# Altium PCB PCB2.PcbDoc
Units mil, origin at the board's own origin, x right, y up, seen from the top; angles counter-clockwise.
Board outline 3800 x 2500 mil, 2 copper layers (Top Layer, Bottom Layer); 24 components, 0 nets, 70 pads, 4 vias.
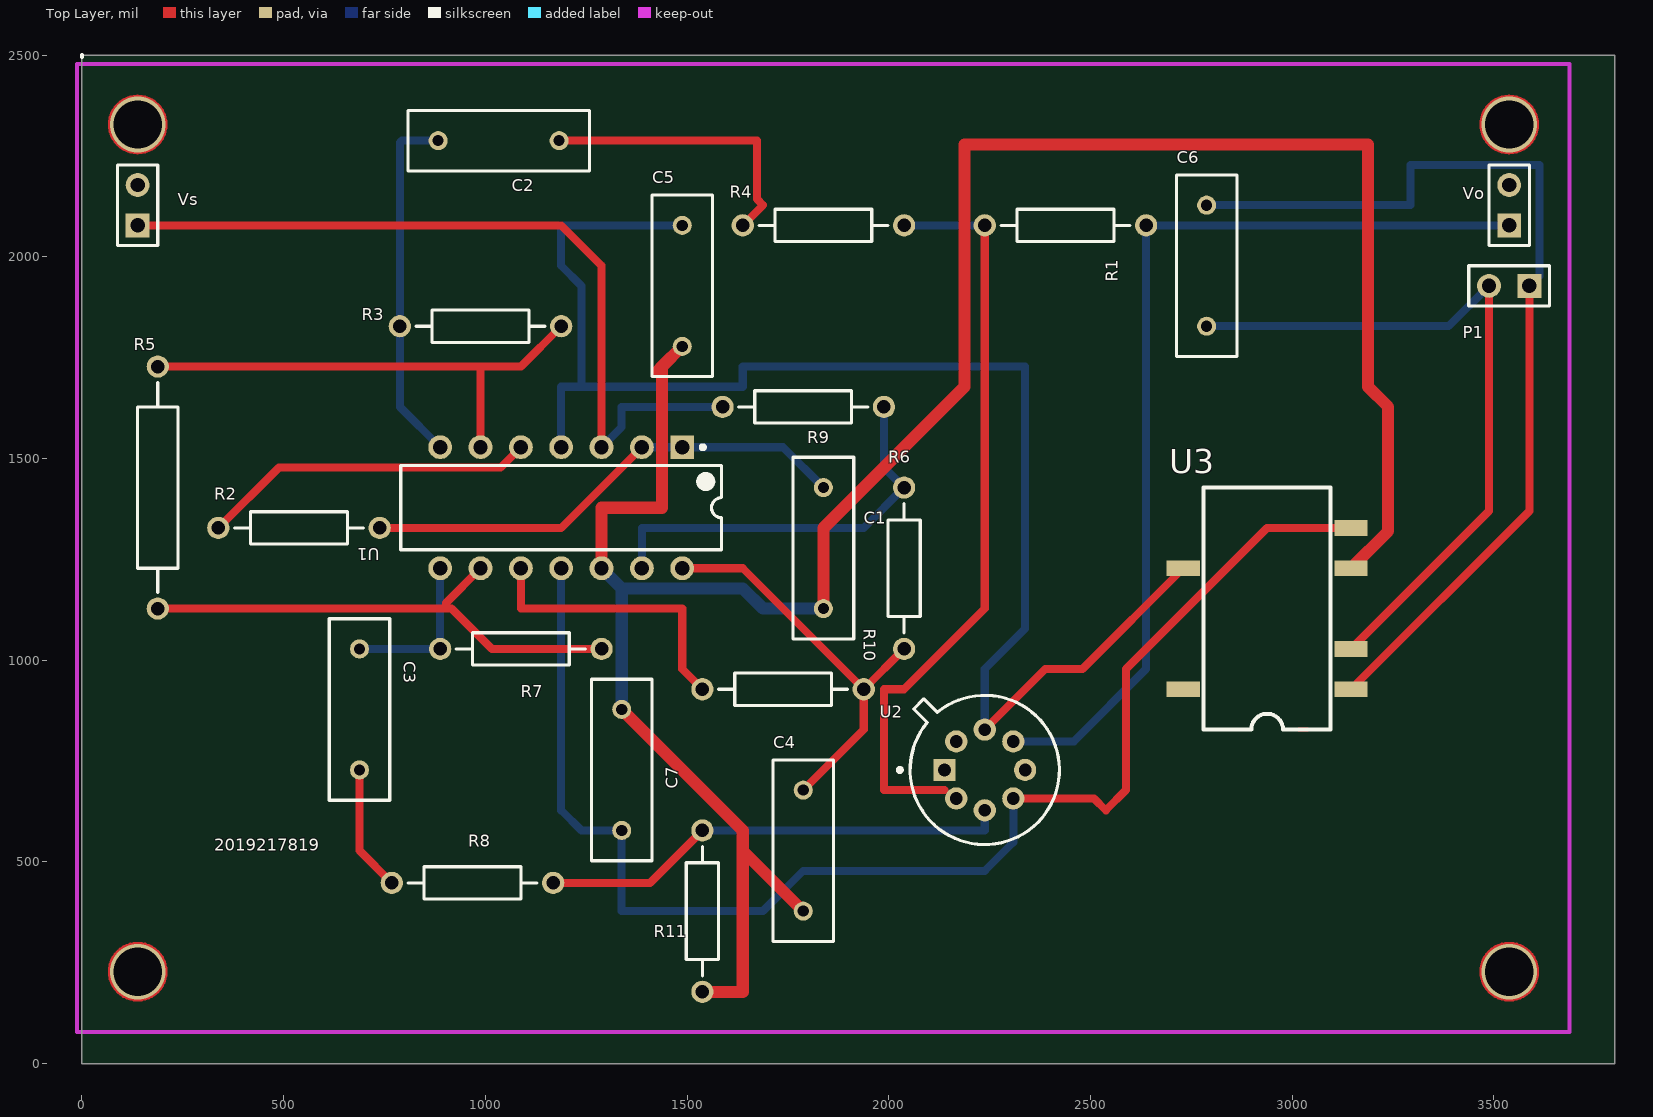
[diagram p0: Top Layer view]
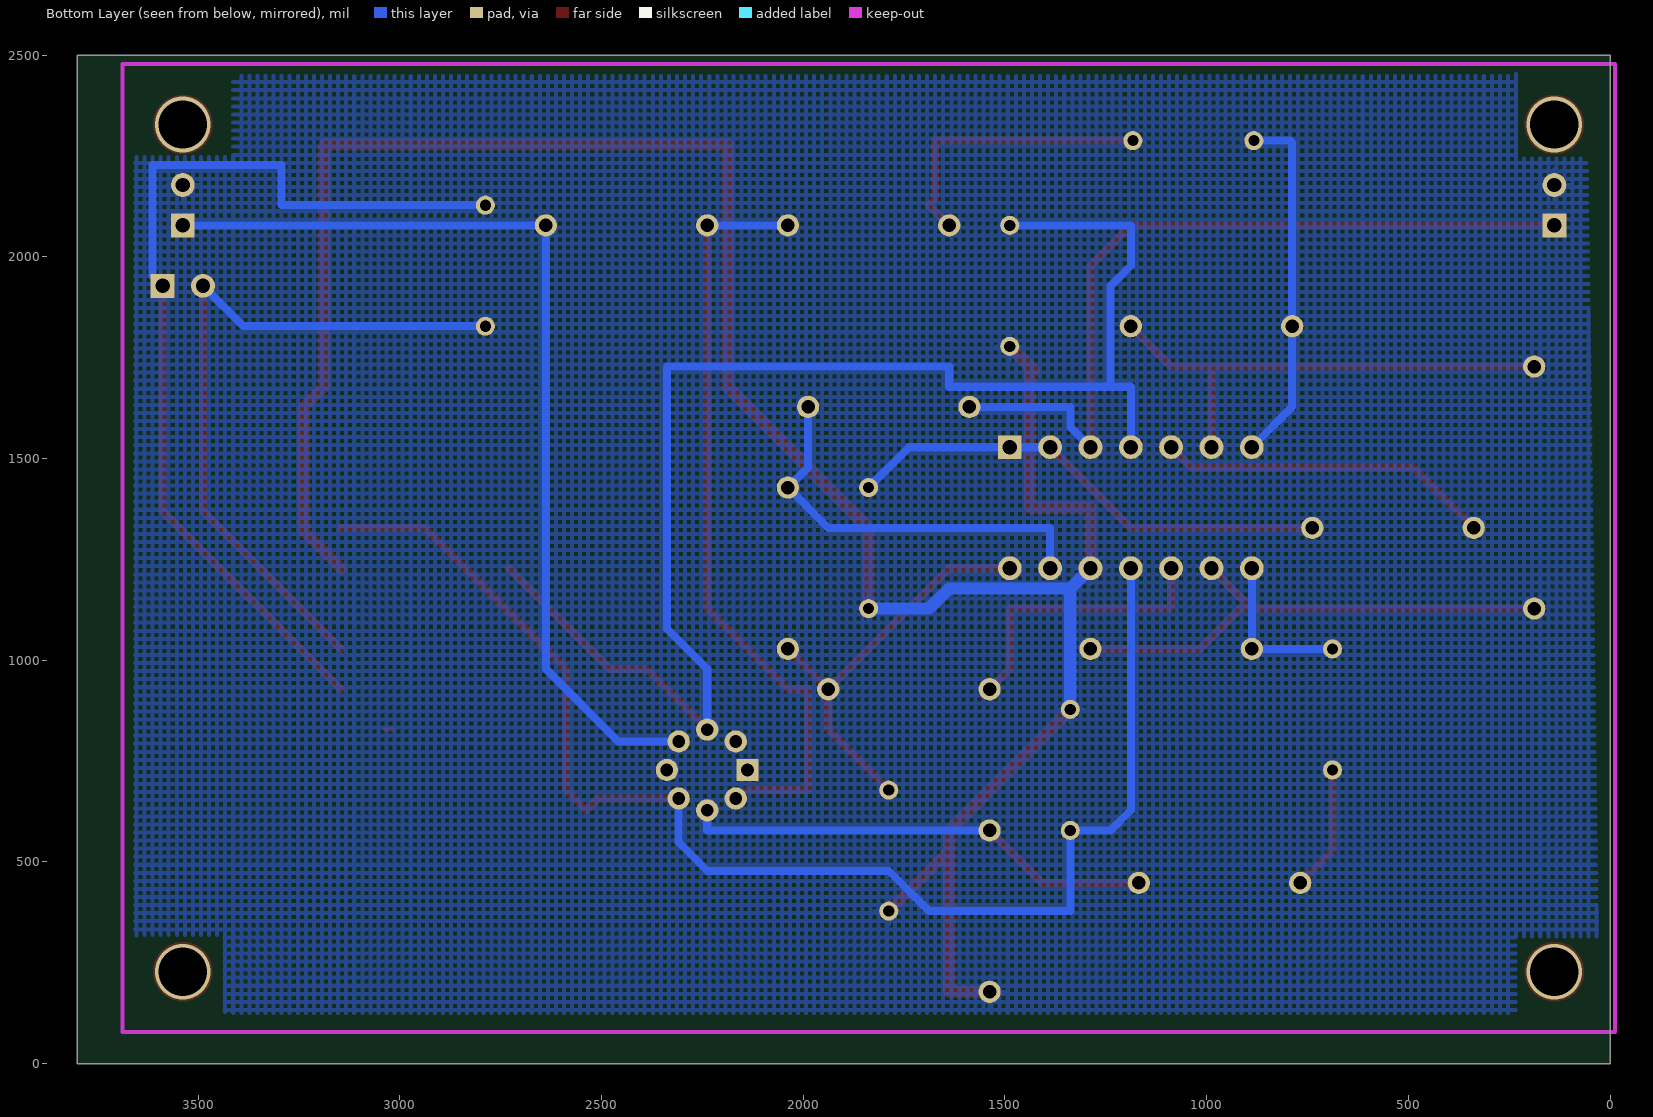
[diagram p1: Bottom Layer view, seen from below]

## Layer stack, top to bottom
Top Layer: signal copper 1.4
Dielectric: dielectric 12.6, FR-4, Dk 4.8
Bottom Layer: signal copper 1.4

## Board outline
0,0 0,2500 3800,2500 3800,0

## Design rules (kind name [scope] priority, off if disabled: settings)
Clearance [All] p1: gap=10
PolygonConnect [All] p1: connectstyle=Relief reliefconductorwidth=10 reliefentries=4 polygonreliefangle="90 Angle"
RoutingVias [All] p1: holewidth=28 width=50 viastyle="Through Hole" minholewidth=28 minwidth=50 maxholewidth=28 maxwidth=50
SilkscreenOverComponentPads [All] p1: minsilkscreentomaskgap=10
SolderMaskExpansion [All] p1: expansion=4
Width [All] p1: maxlimit=10 minlimit=10 preferedwidth=10
27 further rules are at their usual default settings.

## Components (designator, comment, footprint, x,y, rotation, side; value= is the part's Value field where it differs from the comment)
C1 "Cap" RAD-0.3 1838,1278 r90 top
C2 "Cap" RAD-0.3 1033,2288 r0 top
C3 "Cap" RAD-0.3 688,878 r270 top
C4 "Cap" RAD-0.3 1788,528 r90 top
C5 "Cap" RAD-0.3 1488,1928 r90 top
C6 "Cap" RAD-0.3 2788,1978 r270 top
C7 "Cap" RAD-0.3 1338,728 r90 top
P1 "Header 2" HDR1X2 3588,1928 r180 top
R1 "Res2" AXIAL-0.4 2438,2078 r180 top
R2 "Res2" AXIAL-0.4 538,1328 r180 top
R3 "Res2" AXIAL-0.4 988,1828 r180 top
R4 "Res2" AXIAL-0.4 1838,2078 r0 top
R5 "Res Adj2" AXIAL-0.6 188,1428 r90 top
R6 "Res2" AXIAL-0.4 2038,1228 r270 top
R7 "Res2" AXIAL-0.4 1088,1028 r180 top
R8 "Res2" AXIAL-0.4 968,448 r0 top
R9 "Res2" AXIAL-0.4 1788,1628 r0 top
R10 "Res2" AXIAL-0.4 1738,928 r180 top
R11 "Res2" AXIAL-0.4 1538,378 r90 top
U1 "LM124J" J14A 1188,1378 r270 top
U2 "LM741H" H08C 2238,728 r0 top
U3 "Component_1" PCBComponent_1 27438,31628 r90 top
Vo "Header 2" HDR1X2 3538,2078 r90 top
Vs "CON1" HDR1X2 138,2078 r90 top

## Footprints (in the part's own frame and the unit in brackets; to place one, negate y for a bottom-side part, rotate by r counter-clockwise, add the part's x,y. Pads: shape width x height; smd on the part's side, far side on the other; paste and mask are expansions set on the pad)
AXIAL-0.4 [mm] "Axial Device, Thru-Hole; 2 Leads; 0.4 in Pin Spacing"
  round 1.4 hole 0.85: 1(-5.08,0) 2(5.08,0)
  silkscreen extent -4.06,-1.02 4.06,1.02
AXIAL-0.6 [mm] "Axial Device, Thru-Hole; 2 Leads; 0.6 in Pin Spacing"
  round 1.4 hole 0.85: 1(-7.62,0) 2(7.62,0)
  silkscreen extent -6.6,-1.27 6.6,1.27
H08C [mm] "Can; 8 Leads; Pin Circle Dia. 5.08 mm; Lead Dia. 0.48 mm (max)"
  rect 1.4x1.4 hole 0.8: 1(-2.54,0)
  round 1.4 hole 0.8: 2(-1.796,-1.796) 3(0,-2.54) 4(1.796,-1.796) 5(2.54,0) 6(1.796,1.796) 7(0,2.54) 8(-1.796,1.796)
  silkscreen extent -5.47,-4.7 4.7,4.7, body extent -4.71,-4.71 4.71,4.71, height 5.56
HDR1X2 [mm] "Connector; Header; 2 Position"
  rect 1.5x1.5 hole 0.9: 1(0,0)
  round 1.5 hole 0.9: 2(2.54,0)
  silkscreen extent -1.27,-1.27 3.81,1.27
J14A [mm] "DIP, 14-Leads, Row Spacing 7.62mm, Pitch 2.54mm, Body 19.56x6.73mm"
  rect 1.5x1.5 hole 0.9: 1(-3.81,7.62)
  round 1.5 hole 0.9: 2(-3.81,5.08) 3(-3.81,2.54) 4(-3.81,0) 5(-3.81,-2.54) 6(-3.81,-5.08) 7(-3.81,-7.62) 8(3.81,-7.62) 9(3.81,-5.08) 10(3.81,-2.54) 11(3.81,0) 12(3.81,2.54) 13(3.81,5.08) 14(3.81,7.62)
  silkscreen extent -3.93,-10.1 2.65,10.1, body extent -3.6,-10.1 3.6,10.1, height 5.08
PCBComponent_1 [mm]
  rect 1x2.1 smd: 1(-779.78,617.017) 2(-777.24,617.017) 4(-772.16,617.017) 5(-769.62,617.017) 7(-772.16,627.583) 10(-779.78,627.583)
  Top Layer lines w0.254: -782.32,620.3 -782.32,619.76
  silkscreen extent -782.32,618.3 -767.08,626.3
RAD-0.3 [mm] "Radial Cap, Thru-Hole; 2 Leads; 0.3 in Pin Spacing"
  round 1.2 hole 0.7: 1(-3.81,0) 2(3.81,0)
  silkscreen extent -5.71,-1.91 5.71,1.91

## Part data
C1 C2 C3 C4 C5 C6 C7: "Capacitor"
P1 Vo: "Header, 2-Pin"
R1 R2 R3 R4 R6 R7 R8 R9 R10 R11: "Resistor"
R5: "Variable Resistor"
U1: "Low Power Quad Operational Amplifier, 14-pin CerDIP"
U2: "Operational Amplifier, 8-pin TO-99"
Vs: library part "Header 2", "Header, 2-Pin"

## Via types
v1: diameter 138, hole 120, Top Layer to Bottom Layer, 4 vias

## Nets (pads, with @x,y where several pads share a name; then routed paths per layer and width w, separated by ;. In a path a pad name is that pad's centre, name@x,y a point inside that pad or via, vN(x,y) a via of type N, cw(c..) or ccw(c..) an arc to the next point about the centre after c; other vN are vias at no path point)
pads on no net: C1.1 C1.2 C2.1 C2.2 C3.1 C3.2 C4.1 C4.2 C5.1 C5.2 C6.1 C6.2 C7.1 C7.2 P1.1 P1.2 R1.1 R1.2 R2.1 R2.2 R3.1 R3.2 R4.1 R4.2 R5.1 R5.2 R6.1 R6.2 R7.1 R7.2 R8.1 R8.2 R9.1 R9.2 R10.1 R10.2 R11.1 R11.2 U1.1 U1.2 U1.3 U1.4 U1.5 U1.6 U1.7 U1.8 U1.9 U1.10 U1.11 U1.12 U1.13 U1.14 U2.1 U2.2 U2.3 U2.4 U2.5 U2.6 U2.7 U2.8 U3.1 U3.2 U3.4 U3.5 U3.7 U3.10 Vo.1 Vo.2 Vs.1 Vs.2
copper on no net: | length 36301
  Top Layer w10: 207,228 ccw(c138,228) 207,228 ; 207,2328 ccw(c138,2328) 207,2328 ; 3607,228 ccw(c3538,228) 3607,228 ; 3607,2328 ccw(c3538,2328) 3607,2328
  Top Layer w20: 138,2078 1188,2078 1288,1978 1288,1528 ; 188,1128 916.28,1128 1016.28,1028 1288,1028 ; 188,1728 988,1728 ; 338,1328 488,1478 1038,1478 1088,1528 ; 688,728 688,528 768,448 ; 738,1328 1188,1328 1388,1528 ; 902.14,1142.14 988,1228 ; 988,1528 988,1728 ; 1088,1228 1088,1128 1488,1128 1488,978 1538,928 ; 1168,448 1408,448 1538,578 ; 1183,2288 1673,2288 1673,2143 1688,2128 1638,2078 ; 1188,1828 1088,1728 988,1728 ; 1488,1228 1638,1228 1938,928 ; 1788,678 1938,828 1938,928 ; 2038,1028 1938,928 ; 2138,678 1988,678 1988,928 2038,928 2238,1128 2238,2078 ; 2238,828 2388,978 2480,978 2730,1228 ; 2308.71,657.29 2508.71,657.29 2538,628 2588,678 2588,978 2938,1328 3146,1328 ; 3146,928 3588,1370 3588,1928 ; 3146,1028 3488,1370 3488,1928
  Top Layer w30: 1288,1228 1288,1378 1438,1378 1438,1728 ; 1338,878 1638,578 1638,528 ; 1427.53,1717.53 1438,1728 ; 1488,1778 1438,1728 ; 1538,178 1638,178 1638,528 ; 1788,378 1638,528 ; 1838,1128 1838,1328 2188,1678 2188,2278 3188,2278 3188,1678 3238,1628 3238,1320 3146,1228
  Bottom Layer w20: 688,1028 888,1028 888,1228 ; 883,2288 793,2288 788,2283 788,1828 788,1628 888,1528 ; 1188,1228 1188,628 1238,578 1338,578 1338,378 1688,378 1788,478 2238,478 2308.71,548.71 2308.71,657.29 ; 1188,1528 1188,1678 1238,1678 ; 1288,1528 1338,1578 1338,1628 1588,1628 ; 1388,1228 1388,1328 1938,1328 2038,1428 1988,1478 1988,1628 ; 1388,1528 1488,1528 1738,1528 1838,1428 ; 1488,2078 1188,2078 1188,1978 1238,1928 1238,1678 ; 1538,578 2238,578 2238,628 ; 2038,2078 2238,2078 ; 2238,828 2238,978 2338,1078 2338,1728 1638,1728 1638,1678 1238,1678 ; 2308.71,798.71 2458.71,798.71 2638,978 2638,2078 3538,2078 ; 2788,1828 3388,1828 3488,1928 ; 2788,2128 3293,2128 3293,2228 3613,2228 3613,1953
  Bottom Layer w30: 1288,1228 1338,1178 ; 1338,878 1338,1178 ; 1838,1128 1688,1128 1638,1178 1338,1178
  other v1: 138,228 3538,228 138,2328 3538,2328

## Polygon pours and split planes (outlines as drawn)
no net on Drill Guide "Bottom Overlay-No Net" (hatched 90Degree grid 20 track 10): 59,2244 230,2244 231,2245 231,2449 3412,2449 3413,2448 3419,2442 3419,2247 3660,2247 3653,2240 3653,319 3433,319 3432,318 3433,317 3433,124 233,124 234,125 234,316 32,316 31,317
no net on Bottom Layer "Bottom Overlay-No Net" (hatched 90Degree grid 20 track 10, pour order 9): 58,2246 60,2244 233,2244 233,2450 235,2448 3413,2448 3413,2249 3414,2248 3415,2247 3656,2247 3656,317 3655,316 3652,319 3435,319 3435,130 3431,126 234,126 234,315 32,315

## Keep-outs
Keep-Out Layer:
  lines w10: -12,78 -12,2478 3688,2478 3688,78 -12,78

## Silkscreen, mask and mechanical layers (free items; w line width, h text height)
Top Overlay:
  lines w10: 0,2495 0,2500
  text "2019217819" at 328,528 h30